# Altium PCB ClubNIKA.PcbDoc (part 3 of 3)
Units mm, origin at the board's own origin, x right, y up, seen from the top; angles counter-clockwise.
Board outline 246.38 x 165.73 mm, 2 copper layers (Top Layer, Bottom Layer); 346 components, 273 nets, 1174 pads, 422 vias.
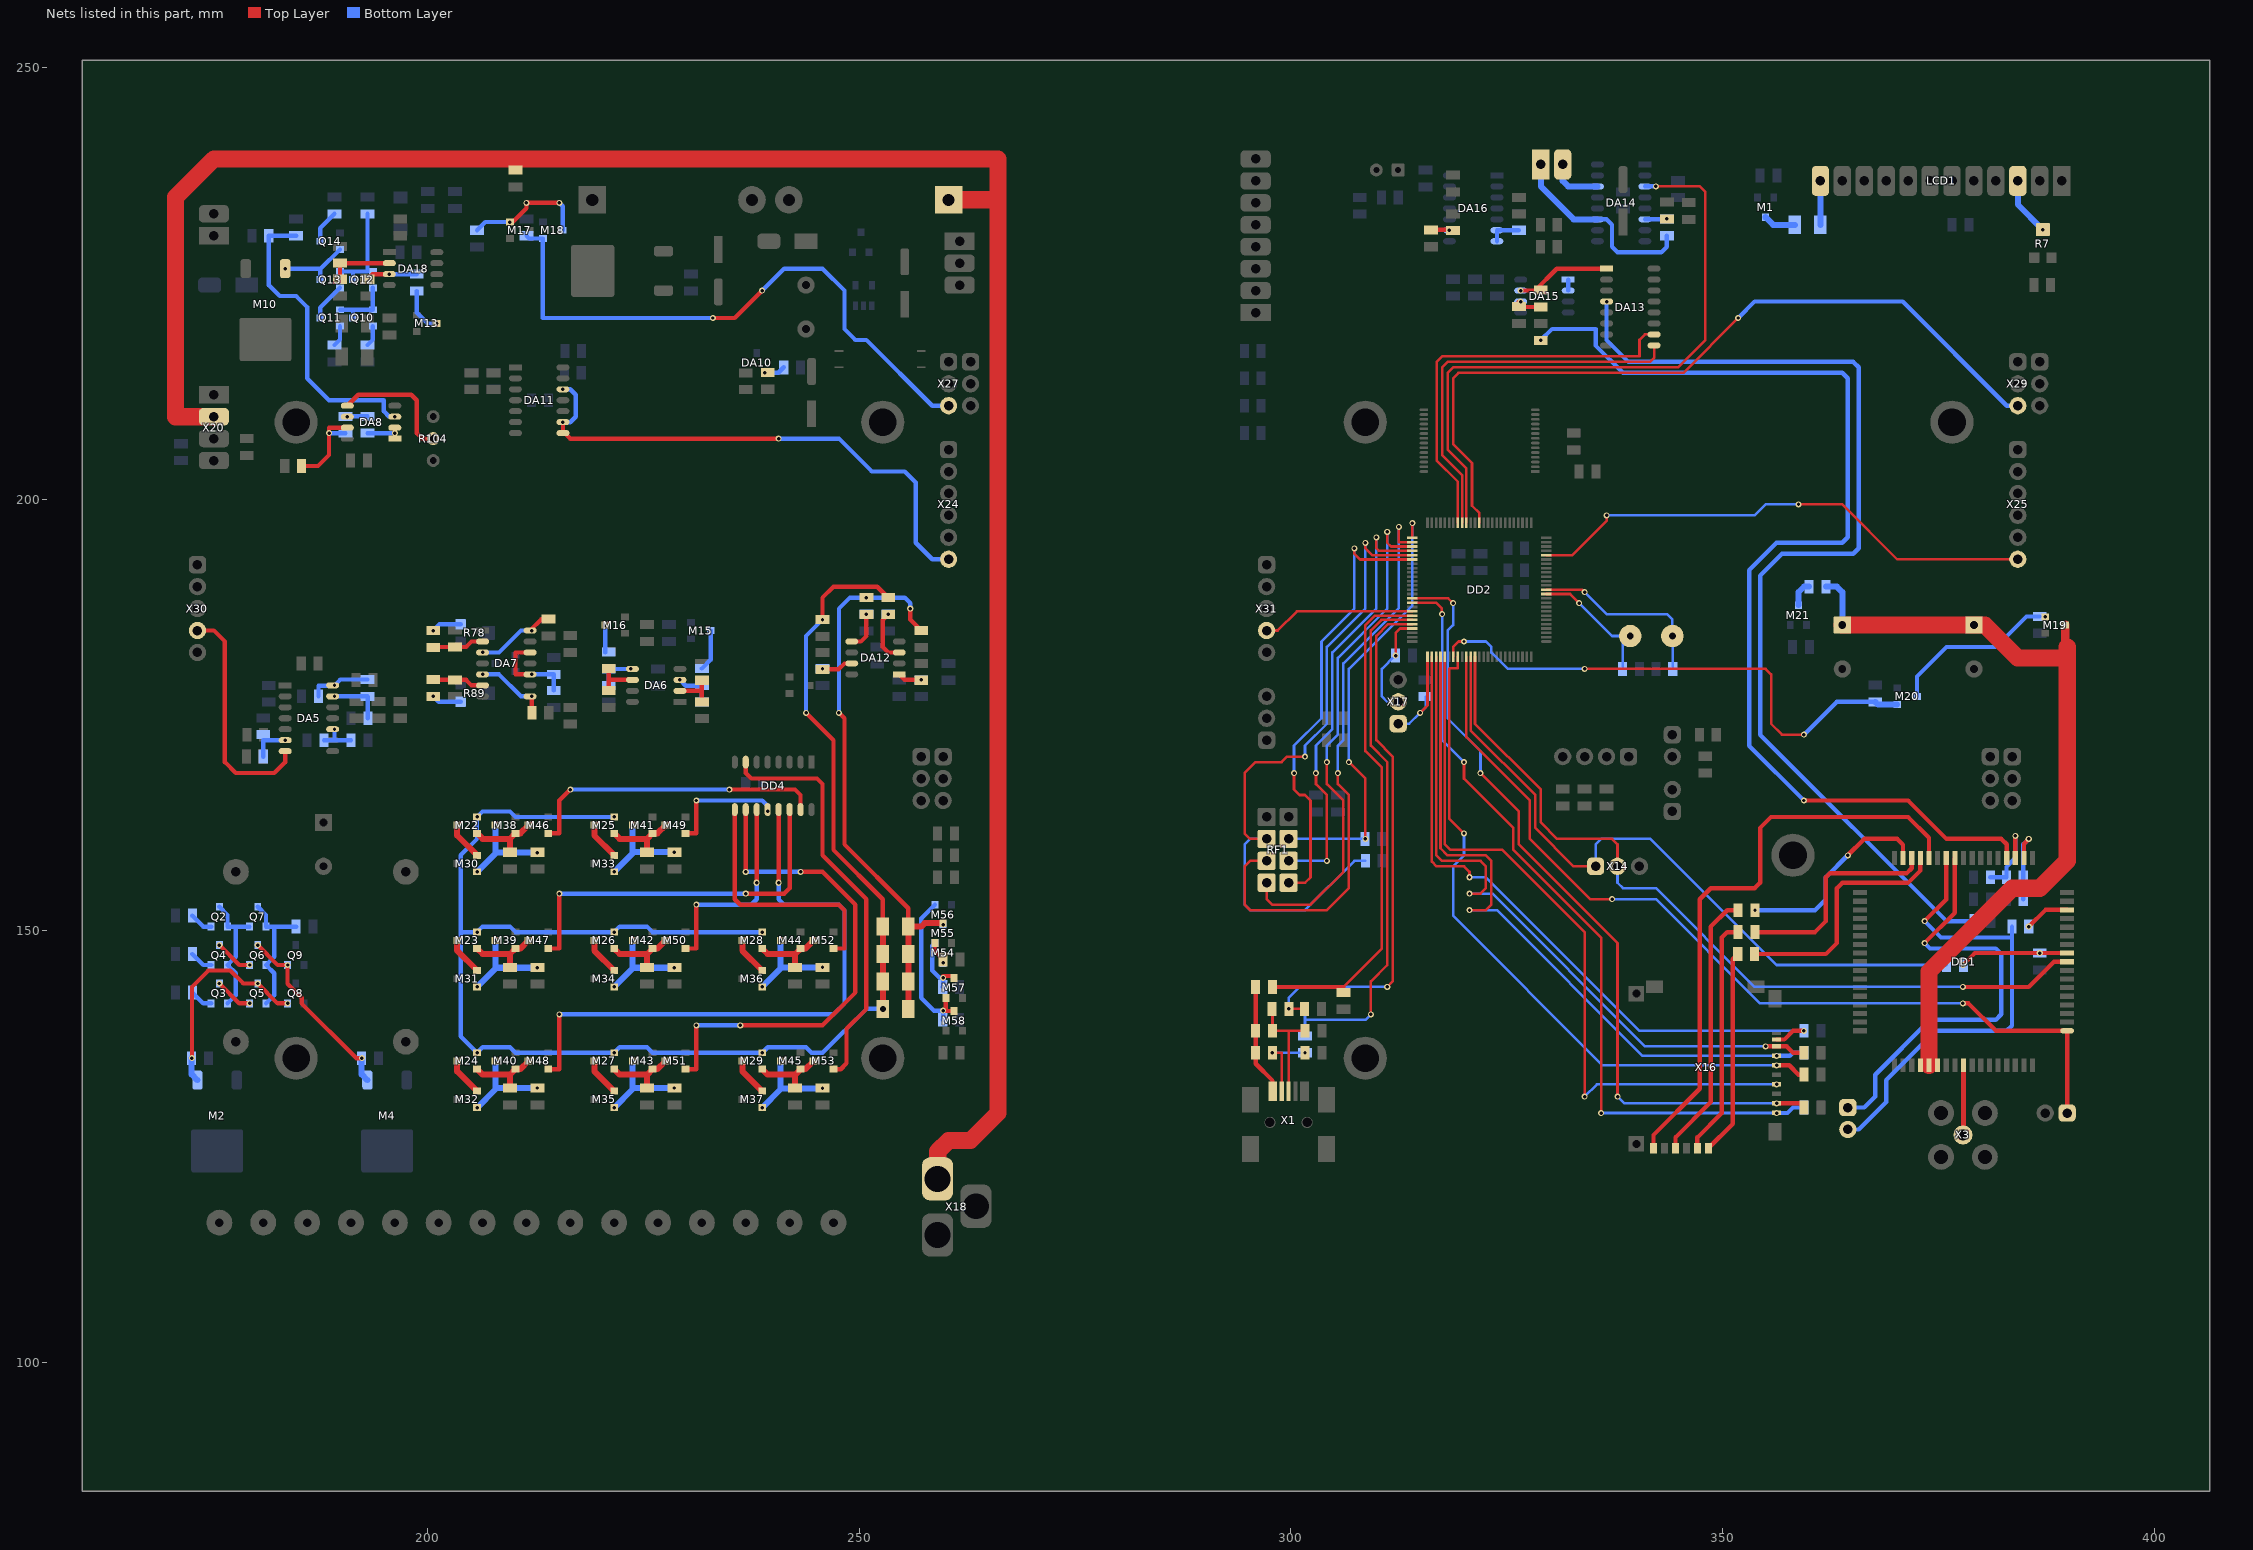
[diagram p3: the nets of this part, all layers, seen from the top]

## Via types
v1: diameter 0.7, hole 0.4, Top Layer to Bottom Layer, 390 vias
v2: diameter 1.3, hole 0.7, Top Layer to Bottom Layer, 15 vias
v3: diameter 1, hole 0.5, Top Layer to Bottom Layer, 6 vias
v4: diameter 1.2, hole 0.6, Top Layer to Bottom Layer, 6 vias
v5: diameter 1.5, hole 1, Top Layer to Bottom Layer, 3 vias
v6: diameter 1.4, hole 0.8, Top Layer to Bottom Layer, 2 vias

## Nets (pads, with @x,y where several pads share a name; then routed paths per layer and width w, separated by ;. In a path a pad name is that pad's centre, name@x,y a point inside that pad or via, vN(x,y) a via of type N, cw(c..) or ccw(c..) an arc to the next point about the centre after c; other vN are vias at no path point) (continued)
NetDA5_6: DA5.6 R114.1 R117.1 | length 4.4
  Bottom Layer w0.5: R117.1@180.975,170.18 180.975,172.085 v1(183.515,172.085)
NetDA5_10: DA5.10 R100.1 R107.2 | length 4.4
  Bottom Layer w0.5: R107.2@188.005,172.085 189.23,172.085 ; v1(189.23,173.355) 189.23,172.085 ; R100.1@191.135,172.085 189.23,172.085
NetDA5_13: DA5.13 R47.1 R48.2 | length 6.3
  Bottom Layer w0.5: v1(189.23,177.165) R47.1@193.04,177.165 ; R48.2@193.085,174.625 R47.1@193.085,177.12
NetDA5_14: DA5.14 R47.2 R49.2 | length 7.1
  Bottom Layer w0.5: R49.2@187.37,177.165 187.37,178.39 v1@189.185,178.39 ; v1(189.23,178.435) 189.91,179.115 R47.2@193.04,179.115
NetDA6_2: DA6.2 R65.2 R67.1 | length 5
  Top Layer w0.5: DA6.2@229.235,177.8 231.753,177.8 ; R67.1@231.775,176.53 R65.2@231.775,179.025
NetDA6_3: DA6.3 R64.1 R69.1 | length 4.7
  Bottom Layer w0.5: v1(229.235,179.07) 229.915,178.39 231.73,178.39 R69.1@231.775,178.435 R64.1@231.775,176.53
NetDA6_5: DA6.5 R59.1 R66.1 | length 3.8
  Bottom Layer w0.5: R59.1@220.98,178.435 R66.1@220.98,180.34 ; R66.1@221.615,180.34 v1(223.52,180.34)
NetDA6_6: DA6.6 R58.1 R60.1 | length 5.3
  Top Layer w0.5: R58.1@220.98,177.845 220.98,179.07 ; R60.1@220.98,180.385 220.98,179.07 ; DA6.6@223.735,179.07 220.98,179.07
NetDA7_2: DA7.2 R77.1 R86.2 | length 5.9
  Top Layer w0.5: R86.2@200.705,182.88 R77.1@203.2,182.88 204.47,182.88 205.105,183.515 DA7.2@206.375,183.515
NetDA7_3: DA7.3 DA7.14 R76.2 | length 9.4
  Top Layer w0.5: DA7.14@211.875,184.785 213.19,186.1 R76.2@213.995,186.1
  Bottom Layer w0.5: v1(206.375,182.245) 208.28,182.245 210.82,184.785 v1(212.09,184.785)
NetDA7_5: DA7.5 DA7.8 R113.1 | length 8.5
  Top Layer w0.5: R113.1@212.09,175.26 DA7.8@212.09,176.95
  Bottom Layer w0.5: v1(206.375,179.705) 208.28,179.705 210.82,177.165 v1(212.09,177.165)
NetDA7_6: DA7.6 R109.2 R112.1 | length 5.9
  Top Layer w0.5: R109.2@200.705,179.07 R112.1@203.2,179.07 204.47,179.07 205.105,178.435 DA7.6@206.375,178.435
NetDA7_10: DA7.10 DA7.12 R87.2 R88.1 | length 10.5
  Top Layer w0.5: DA7.12@211.875,182.245 210.185,182.245 210.185,179.705 DA7.10@211.875,179.705 v1(212.09,179.705)
  Bottom Layer w0.5: v1(212.09,179.705) R88.1@214.63,179.705 R87.2@214.63,177.845
NetDA8_1: DA8.1 DA8.2 R98.1 | length 4.4
  Top Layer w0.5: DA8.1@196.215,207.01 v1(196.215,207.645) DA8.2@196.215,208.28
  Bottom Layer w0.5: R98.1@193.04,207.645 v1(196.215,207.645)
NetDA8_3: DA8.3 R101.1 R103.1 | length 35.4
  Bottom Layer w0.5: R103.1@184.785,230.505 R101.1@181.61,230.505 181.61,224.79 182.88,223.52 184.785,223.52 186.055,222.25 186.055,213.995 188.595,211.455 194.945,211.455 194.945,210.185 195.58,209.55 v1(196.215,209.55)
NetDA8_5: DA8.5 R104.3 | length 14.8
  Top Layer w0.5: DA8.5@190.715,210.82 191.985,212.09 198.12,212.09 198.755,211.455 198.755,207.645 199.39,207.01 R104.3@200.66,207.01
NetDA8_6: DA8.6 R98.2 R106.2 | length 2.3
  Bottom Layer w0.5: R106.2@190.76,209.595 R98.2@193.04,209.595
  other v1: 190.715,209.55
NetDA8_7: DA8.7 R106.1 R111.1 | length 10.9
  Top Layer w0.5: R111.1@185.42,203.835 187.325,203.835 188.595,205.105 v1(188.595,207.645) 188.595,208.28 DA8.7@190.715,208.28
  Bottom Layer w0.5: v1(188.595,207.645) R106.1@190.5,207.645
NetDA10_1: DA10.1 R139.2 R140.2 | length 2.4
  Bottom Layer w0.5: v1(239.075,214.63) 240.62,214.63 R139.2@241.255,215.265
NetDA12_1: DA12.1 R172.2 R182.1 | length 2.8
  Top Layer w0.5: DA12.1@254.635,179.705 255.27,179.07 R172.2@257.13,179.07
  other v1: 257.175,179.07
NetDA12_3: DA12.3 R177.2 R178.1 | length 6.2
  Top Layer w0.5: R177.2@253.365,186.645 252.73,186.01 252.73,182.88 253.365,182.245 DA12.3@254.635,182.245
  other v1: 253.365,186.69
NetDA12_5: DA12.5 R179.2 R181.1 | length 4.4
  Top Layer w0.5: DA12.5@249.135,183.515 250.19,183.515 250.825,184.15 R179.2@250.825,186.645
  other v1: 250.825,186.69
NetDA12_7: DA12.7 R174.2 R183.2 | length 3.7
  Top Layer w0.5: R174.2@245.745,180.295 247.605,180.295 248.285,180.975 DA12.7@249.135,180.975
  other v1: 245.745,180.34
NetDA13_4: DA13.4 R186.1 | length 120.8
  Bottom Layer w0.5: v1(336.55,222.885) 336.55,218.44 339.09,215.9 365.125,215.9 365.76,215.265 365.76,194.31 365.125,193.675 356.87,193.675 354.33,191.135 354.33,172.72 375.92,151.13 R186.1@379.095,151.13
NetDA14_6: DA14.6 R184.2 R185.1 | length 2.6
  Bottom Layer w0.5: DA14.6@340.995,232.41 343.49,232.41 v1(343.535,232.455)
NetDA14_11: DA14.11 LS1.1 R184.1 | length 23.3
  Bottom Layer w0.5: DA14.11@335.495,232.41 336.55,232.41 337.185,231.775 337.185,229.235 337.82,228.6 342.9,228.6 343.535,229.235 R184.1@343.535,230.505
  Bottom Layer w0.7: LS1.1@328.93,238.76 328.93,236.22 332.74,232.41 DA14.11@335.495,232.41
NetDA14_14: DA14.14 LS1.2 | length 6.2
  Bottom Layer w0.7: LS1.2@331.47,238.76 331.47,236.855 332.105,236.22 DA14.14@335.495,236.22
NetDA15_1: DA15.1 DA15.2 | length 1.3
  Bottom Layer w0.5: DA15.2@332.105,224.155 DA15.1@332.105,225.425
NetDA15_6: DA15.6 R189.1 R190.2 | length 2.8
  Top Layer w0.5: R190.2@326.435,222.25 R189.1@328.93,222.25 ; v1@326.435,222.84 326.39,222.885 v1(326.605,222.885)
NetDA16_6: DA16.6 DA16.7 R200.1 | length 3.8
  Bottom Layer w0.5: DA16.7@323.85,229.87 DA16.6@323.85,231.14 R200.1@326.39,231.14
NetDA16_9: DA16.9 R192.2 R193.2 | length 2.4
  Top Layer w0.5: R192.2@316.23,231.185 R193.2@318.68,231.185
  other v1: 318.35,231.14
NetDA18_2: DA18.2 R212.2 R214.1 | length 7.6
  Top Layer w0.5: R212.2@189.865,225.47 R214.1@189.865,227.33 DA18.2@195.58,227.33
NetDA18_3: DA18.3 R211.2 R213.1 | length 6
  Top Layer w0.5: R211.2@193.04,225.47 193.63,226.06 v1(195.58,226.06)
  Bottom Layer w0.5: v1(195.58,226.06) R213.1@198.755,226.06
NetDD1_10: DD1.10 R13.2 R14.1 | length 12.6
  Top Layer w0.5: v1(377.825,146.05) 379.205,147.43 DD1.10@389.89,147.43
  other v1: 386.715,147.43
NetDD1_60: DD1.60 X3.1 | length 8.2
  Top Layer w0.6: X3.1@377.825,126.365 X3.1@377.89,126.43 ; X3.1@377.89,126.365 DD1.60@377.89,134.43
NetDD4_7: DD4.7 M53.1 | length 47.9
  Top Layer w0.5: DD4.7@236.855,169.545 236.855,168.275 237.49,167.64 245.11,167.64 245.745,167.005 245.745,158.75 250.825,153.67 250.825,140.97 248.527,138.672 248.527,134.662 247.851,133.985 M53.1@247.015,133.985
NetDD4_9: DD4.9 M52.1 | length 29.3
  Top Layer w0.5: DD4.9@235.585,164.045 235.585,153.67 236.22,153.035 247.65,153.035 248.285,152.4 248.285,147.955 M52.1@247.015,147.955
NetDD4_10: DD4.10 M51.1 | length 58
  Top Layer w0.5: M51.1@229.87,133.985 231.14,133.985 v1(231.14,139.065) ; v1(236.22,139.065) 245.745,139.065 249.555,142.875 249.555,153.035 245.745,156.845 v1(243.205,156.845) ; v1(236.855,156.845) DD4.10@236.855,164.045
  Bottom Layer w0.5: v1(231.14,139.065) v1(236.22,139.065) ; v1(236.855,156.845) v1(243.205,156.845)
NetDD4_11: DD4.11 M50.1 | length 24
  Top Layer w0.5: M50.1@229.87,147.955 231.14,147.955 v1(231.14,153.035) ; v1(238.125,155.575) DD4.11@238.125,164.045
  Bottom Layer w0.5: v1(231.14,153.035) 237.49,153.035 238.125,153.67 v1(238.125,155.575)
NetDD4_12: DD4.12 M49.1 | length 14.2
  Top Layer w0.5: M49.1@229.87,161.29 231.14,161.29 v1(231.14,165.1)
  Bottom Layer w0.5: v1(231.14,165.1) 238.76,165.1 239.395,164.465 v1(239.395,163.83)
NetDD4_13: DD4.13 M48.1 | length 70.5
  Top Layer w0.5: M48.1@213.995,133.985 215.265,133.985 v1@215.265,140.368 ; v1(240.665,155.575) DD4.13@240.665,164.045
  Bottom Layer w0.5: v1(215.265,140.335) 219.075,140.335 247.015,140.335 248.285,141.605 248.285,152.4 247.65,153.035 241.3,153.035 240.665,153.67 v1(240.665,155.575)
NetDD4_14: DD4.14 M47.1 | length 43.7
  Top Layer w0.5: M47.1@213.995,147.955 215.265,147.955 v1(215.265,154.305) ; v1(236.855,154.305) 241.3,154.305 241.935,154.94 DD4.14@241.935,164.045
  Bottom Layer w0.5: v1(215.265,154.305) 229.235,154.305 v1(236.855,154.305)
NetDD4_15: DD4.15 M46.1 | length 35.5
  Top Layer w0.5: M46.1@213.995,161.29 215.265,161.29 215.265,165.1 v1(216.535,166.37) ; v1(234.95,166.37) 242.57,166.37 243.205,165.735 DD4.15@243.205,164.045
  Bottom Layer w0.5: v1(216.535,166.37) v1(234.95,166.37)
NetLCD1_LED-: LCD1.LED- R5.1 | length 5.1
  Bottom Layer w0.7: R5.1@361.315,231.775 LCD1.LED-@361.315,236.855
NetLCD1_V0: LCD1.V0 R7.3 | length 6.8
  Bottom Layer w0.7: LCD1.V0@384.175,236.855 384.175,234.12 v1(387.08,231.215)
NetM1_3: M1.3 R5.2 | length 3.8
  Bottom Layer w0.7: M1.3@354.965,232.65 355.84,231.775 R5.2@358.365,231.775
NetM2_1: M2.1 Q5.3 Q8.2 R45.2 | length 24.5
  Top Layer w0.5: v1(172.72,135.255) 172.72,143.51 174.625,145.415 177.165,145.415 178.675,143.905 v1(180.34,143.905) 182.64,141.605 v1(183.79,141.605)
  Bottom Layer w0.7: R45.2@172.675,135.255 172.675,133.395 M2.1@173.355,132.715
NetM4_1: M4.1 Q6.3 Q9.2 R54.2 | length 22
  Top Layer w0.5: v1(180.34,148.35) 182.64,146.05 v1(183.79,146.05) 183.79,143.87 185.42,142.24 185.42,141.605 191.77,135.255 v1(192.405,135.255)
  Bottom Layer w0.7: R54.2@192.36,135.255 192.36,133.395 M4.1@193.04,132.715
NetM10_1: M10.1 Q13.3 Q14.2 | length 8.5
  Bottom Layer w0.5: v1(183.515,226.695) 187.49,226.695 187.565,226.62 ; Q13.3@187.565,225.425 187.565,226.62 ; Q14.2@189.865,228.92 187.565,226.62
NetM13_3: M13.3 R213.2 | length 5.3
  Bottom Layer w0.5: R213.2@198.755,224.11 198.755,221.615 200.025,220.345 v1(201.055,220.345)
NetM15_3: M15.3 R69.2 | length 4.8
  Bottom Layer w0.5: R69.2@231.775,180.385 232.805,181.415 M15.3@232.805,184.785
NetM16_3: M16.3 R66.2 | length 3.2
  Bottom Layer w0.5: R66.2@220.585,182.245 v1(220.585,185.42)
NetM17_1: M17.1 M18.3 R92.1 | length 14.6
  Top Layer w0.5: v1(209.55,232.09) 209.865,232.09 211.455,233.68 v1(211.455,234.315) v1(215.265,234.315)
  Bottom Layer w0.5: R92.1@205.74,231.14 206.69,232.09 v1(209.55,232.09) ; v1(215.265,234.315) 215.66,233.92 M18.3@215.66,231.14
NetM19_1: M19.1 M20.3 R115.2 | length 19.4
  Bottom Layer w0.5: M20.3@372.505,177.165 372.505,179.465 375.92,182.88 381.635,182.88 385.175,186.42 R115.2@386.715,186.42
  other v1: 387.35,186.37
NetM21_3: M21.3 R116.2 | length 3
  Bottom Layer w0.7: M21.3@358.775,187.72 358.775,189.23 359.41,189.865 R116.2@360,189.865
NetM22_1: M22.1 M38.1 M46.3 R147.2 | length 8.4
  Top Layer w0.7: M22.1@205.74,161.29 206.375,160.655 209.55,160.655 ; R147.2@209.55,159.11 209.55,160.655 ; M46.3@211.695,162.24 210.745,161.29 M38.1@210.185,161.29 209.55,160.655
NetM22_3: M22.3 M30.2 | length 4.4
  Top Layer w0.7: M22.3@203.44,162.24 203.44,161.045 M30.2@205.74,158.745
NetM23_1: M23.1 M39.1 M47.3 R149.2 | length 8.4
  Top Layer w0.7: M23.1@205.74,147.955 206.375,147.32 209.55,147.32 ; R149.2@209.55,145.775 209.55,147.32 ; M47.3@211.695,148.905 210.745,147.955 M39.1@210.185,147.955 209.55,147.32
NetM23_3: M23.3 M31.2 | length 4.4
  Top Layer w0.7: M23.3@203.44,148.905 203.44,147.71 M31.2@205.74,145.41
NetM24_1: M24.1 M40.1 M48.3 R151.2 | length 8.4
  Top Layer w0.7: M24.1@205.74,133.985 206.375,133.35 209.55,133.35 ; R151.2@209.55,131.805 209.55,133.35 ; M48.3@211.695,134.935 210.745,133.985 M40.1@210.185,133.985 209.55,133.35
NetM24_3: M24.3 M32.2 | length 4.4
  Top Layer w0.7: M24.3@203.44,134.935 203.44,133.74 M32.2@205.74,131.44
NetM25_1: M25.1 M41.1 M49.3 R153.2 | length 8.4
  Top Layer w0.7: M25.1@221.615,161.29 222.25,160.655 225.425,160.655 ; R153.2@225.425,159.11 225.425,160.655 ; M49.3@227.57,162.24 226.62,161.29 M41.1@226.06,161.29 225.425,160.655
NetM25_3: M25.3 M33.2 | length 4.4
  Top Layer w0.7: M25.3@219.315,162.24 219.315,161.045 M33.2@221.615,158.745
NetM26_1: M26.1 M42.1 M50.3 R155.2 | length 8.4
  Top Layer w0.7: M26.1@221.615,147.955 222.25,147.32 225.425,147.32 ; R155.2@225.425,145.775 225.425,147.32 ; M50.3@227.57,148.905 226.62,147.955 M42.1@226.06,147.955 225.425,147.32
NetM26_3: M26.3 M34.2 | length 4.4
  Top Layer w0.7: M26.3@219.315,148.905 219.315,147.71 M34.2@221.615,145.41
NetM27_1: M27.1 M43.1 M51.3 R157.2 | length 8.4
  Top Layer w0.7: M27.1@221.615,133.985 222.25,133.35 225.425,133.35 ; R157.2@225.425,131.805 225.425,133.35 ; M51.3@227.57,134.935 226.62,133.985 M43.1@226.06,133.985 225.425,133.35
NetM27_3: M27.3 M35.2 | length 4.4
  Top Layer w0.7: M27.3@219.315,134.935 219.315,133.74 M35.2@221.615,131.44
NetM28_1: M28.1 M44.1 M52.3 R159.2 | length 8.4
  Top Layer w0.7: M28.1@238.76,147.955 239.395,147.32 242.57,147.32 ; R159.2@242.57,145.775 242.57,147.32 ; M52.3@244.715,148.905 243.765,147.955 M44.1@243.205,147.955 242.57,147.32
NetM28_3: M28.3 M36.2 | length 4.4
  Top Layer w0.7: M28.3@236.46,148.905 236.46,147.71 M36.2@238.76,145.41
NetM29_1: M29.1 M45.1 M53.3 R161.2 | length 8.4
  Top Layer w0.7: M29.1@238.76,133.985 239.395,133.35 242.57,133.35 ; R161.2@242.57,131.805 242.57,133.35 ; M53.3@244.715,134.935 243.765,133.985 M45.1@243.205,133.985 242.57,133.35
NetM29_3: M29.3 M37.2 | length 4.4
  Top Layer w0.7: M29.3@236.46,134.935 236.46,133.74 M37.2@238.76,131.44
NetM30_1: M30.1 M38.3 R148.2 | length 11
  Bottom Layer w0.7: v1(205.74,156.845) 207.885,158.99 v1(207.885,162.24) ; 207.96,159.065 v1(212.725,159.065)
NetM31_1: M31.1 M39.3 R150.2 | length 11.2
  Bottom Layer w0.7: v1(205.74,143.51) 207.885,145.655 ; v1(207.885,148.905) 207.885,145.655 ; v1(212.725,145.73) 207.96,145.73 207.885,145.655
NetM32_1: M32.1 M40.3 R152.2 | length 11
  Bottom Layer w0.7: v1(205.74,129.54) 207.885,131.685 v1(207.885,134.935) ; 208.005,131.805 v1(212.725,131.805)
NetM33_1: M33.1 M41.3 R154.2 | length 11
  Bottom Layer w0.7: v1(221.615,156.845) 223.76,158.99 v1(223.76,162.24) ; 223.88,159.11 v1(228.6,159.11)
NetM34_1: M34.1 M42.3 R156.2 | length 11.2
  Bottom Layer w0.7: v1(221.615,143.51) 223.76,145.655 ; v1(223.76,148.905) 223.76,145.655 ; v1(228.6,145.73) 223.835,145.73 223.76,145.655
NetM35_1: M35.1 M43.3 R158.2 | length 11.2
  Bottom Layer w0.7: v1(221.615,129.54) 223.76,131.685 ; v1(223.76,134.935) 223.76,131.685 ; v1(228.6,131.805) 223.88,131.805 223.76,131.685
NetM36_1: M36.1 M44.3 R160.2 | length 11.2
  Bottom Layer w0.7: v1(238.76,143.51) 240.905,145.655 ; v1(240.905,148.905) 240.905,145.655 ; v1(245.745,145.775) 241.025,145.775 240.905,145.655
NetM37_1: M37.1 M45.3 R162.2 | length 11.2
  Bottom Layer w0.7: v1(238.76,129.54) 240.905,131.685 ; v1(240.905,134.935) 240.905,131.685 ; v1(245.745,131.76) 240.98,131.76 240.905,131.685
NetM54_1: M54.1 M57.3 R167.2 | length 7.4
  Top Layer w0.5: v1@259.715,144.78 260.745,144.78 M57.3@260.985,144.54
  Bottom Layer w0.5: M54.1@258.765,148.59 258.445,148.27 258.445,145.415 259.295,144.565 v1(259.715,144.565) 259.715,143.555 R167.2@259.67,143.51
NetM54_3: M54.3 M55.1 R175.1 | length 2.3
  Top Layer w0.5: M55.1@258.765,148.59 258.765,147.635 R175.1@259.715,146.685
  other v1: 259.715,146.29
NetM56_1: M56.1 M57.1 M58.3 R166.2 | length 18.1
  Top Layer w0.5: v1@260.035,140.73 M58.3@260.985,140.73 ; v1@260.035,140.755 M57.1@260.035,142.24
  Bottom Layer w0.5: M56.1@258.765,153.035 257.175,151.445 257.175,142.24 258.66,140.755 v1(259.715,140.755) 259.715,139.745 R166.2@259.67,139.7
NetQ2_1: Q2.1 Q2.3 Q3.1 Q4.1 Q7.2 | length 15.3
  Bottom Layer w0.5: Q2.3@175.895,152.795 176.845,151.845 Q2.1@176.845,150.495 177.8,150.495 ; Q3.1@176.845,141.605 177.8,142.56 177.8,145.095 Q4.1@176.845,146.05 177.8,147.005 177.8,150.495 ; Q7.2@179.39,150.495 177.8,150.495
NetQ2_2: Q2.2 R62.2 | length 2.7
  Bottom Layer w0.5: R62.2@172.765,151.765 174.035,150.495 Q2.2@174.945,150.495
NetQ3_2: Q3.2 R56.2 | length 2.7
  Bottom Layer w0.5: R56.2@172.765,142.875 174.035,141.605 Q3.2@174.945,141.605
NetQ3_3: Q3.3 Q5.2 | length 4.4
  Top Layer w0.5: v1(175.895,143.905) 178.195,141.605 v1(179.39,141.605)
NetQ4_2: Q4.2 R57.2 | length 2.7
  Bottom Layer w0.5: R57.2@172.765,147.32 174.035,146.05 Q4.2@174.945,146.05
NetQ4_3: Q4.3 Q6.2 | length 4.4
  Top Layer w0.5: v1(175.895,148.35) 178.195,146.05 v1(179.39,146.05)
NetQ5_1: Q5.1 Q6.1 Q7.1 Q7.3 R68.1 | length 17.2
  Bottom Layer w0.5: Q7.3@180.34,152.795 181.29,151.845 Q7.1@181.29,150.495 ; Q5.1@181.29,141.605 182.245,142.56 182.245,145.095 Q6.1@181.29,146.05 182.245,147.005 182.245,150.495 Q7.1@181.29,150.495 ; R68.1@184.785,150.495 Q7.1@181.29,150.495
NetQ10_1: Q10.1 Q10.3 Q11.1 Q12.2 | length 7.3
  Bottom Layer w0.5: Q11.1@189.865,221.93 191.375,221.93 ; Q10.3@191.375,220.98 191.375,221.93 ; Q12.2@193.675,224.475 Q10.1@193.675,221.93 191.375,221.93
NetQ10_2: Q10.2 R72.2 | length 2.4
  Bottom Layer w0.5: R72.2@193.04,217.85 193.675,218.485 Q10.2@193.675,220.03
NetQ11_2: Q11.2 R73.2 | length 2.4
  Bottom Layer w0.5: R73.2@189.23,217.85 189.865,218.485 Q11.2@189.865,220.03
NetQ11_3: Q11.3 Q13.2 | length 4.4
  Bottom Layer w0.5: Q11.3@187.565,220.98 187.565,222.175 Q13.2@189.865,224.475
NetQ12_1: Q12.1 Q12.3 Q13.1 R85.1 | length 10.8
  Bottom Layer w0.5: Q13.1@189.865,226.375 191.375,226.375 ; Q12.3@191.375,225.425 191.375,226.375 ; R85.1@193.04,233.045 193.04,226.375 191.375,226.375
NetQ14_3: Q14.3 R210.1 | length 3.9
  Bottom Layer w0.5: Q14.3@187.565,229.87 187.565,231.38 R210.1@189.23,233.045
NetR1_1: R1.1 R2.1 R6.1 X1.+5 | length 12.9
  Top Layer w0.5: R6.1@295.91,143.51 R1.1@295.91,138.43 R2.1@295.91,135.89 295.91,134.62 297.87,132.66 X1.+5@297.87,131.445
NetR1_2: R1.2 R4.1 R10.1 X1.D+ | length 13.2
  Top Layer w0.3: R4.1@297.86,140.925 R1.2@297.86,138.43 299.72,138.43 ; X1.D+@299.72,131.445 299.72,138.43 ; R10.1@301.625,138.43 299.72,138.43
NetR2_2: R2.2 R3.1 R11.1 X1.D- | length 9.3
  Top Layer w0.3: R2.2@297.86,135.89 298.92,135.89 X1.D-@298.92,131.445
  Bottom Layer w0.3: v1(297.815,135.89) v1(301.625,135.89)
NetR23_1: R23.1 X16.SIM_CLK | length 27.7
  Top Layer w0.5: X16.SIM_CLK@347.065,124.83 347.065,126.085 349.885,128.905 349.885,149.225 350.52,149.86 R23.1@351.79,149.86
NetR24_2: R24.2 X16.SIM_DATA | length 23.9
  Top Layer w0.5: X16.SIM_DATA@348.335,124.83 351.155,127.65 351.155,146.73 R24.2@351.745,147.32
NetR25_1: R25.1 X16.SIM_RES | length 31.3
  Top Layer w0.5: X16.SIM_RES@344.525,124.83 344.525,126.085 348.615,130.175 348.615,150.495 350.52,152.4 R25.1@351.79,152.4
NetR78_2: R78.2 R86.1 | length 3.5
  Bottom Layer w0.5: v1(200.66,184.785) 201.39,185.515 R78.2@203.835,185.515
NetR89_1: R89.1 R109.1 | length 3.4
  Bottom Layer w0.5: v1(200.66,177.165) 201.295,176.53 R89.1@203.835,176.53
NRF_CE: DD2.55 R43.1 RF1.3 | length 78
  Top Layer w0.3: RF1.3@297.18,160.655 295.275,160.655 294.64,161.29 294.64,168.275 295.91,169.545 298.926,169.545 299.561,170.18 v1(301.625,170.18) ; v1(308.61,194.945) 308.61,194.31 309.405,193.515 DD2.55@314.065,193.515
  Bottom Layer w0.3: RF1.3@297.18,160.655 295.275,160.655 294.64,160.02 294.64,153.035 295.275,152.4 301.625,152.4 307.34,158.115 R43.1@308.61,158.115 ; v1(301.625,170.18) 301.625,171.45 304.165,173.99 304.165,182.88 308.61,187.325 v1(308.61,194.945)
NRF_CSN: DD2.51 R42.2 RF1.4 | length 51
  Top Layer w0.3: v1(306.705,169.545) 308.61,167.64 v1(308.61,160.655) ; DD2.51@314.065,195.515 v1(314.065,197.225)
  Bottom Layer w0.3: RF1.4@299.72,160.655 v1(308.61,160.655) ; v1(306.705,169.545) 306.705,180.34 314.065,187.7 v1(314.065,197.225)
NRF_IRQ: DD2.56 RF1.8 | length 52.6
  Top Layer w0.3: RF1.8@299.72,155.575 301.625,155.575 302.26,156.21 302.26,165.1 301.625,165.735 300.99,165.735 300.355,166.37 v1(300.355,168.275) ; v1(307.34,194.31) 307.34,193.675 308,193.015 DD2.56@314.065,193.015
  Bottom Layer w0.3: v1(300.355,168.275) 300.355,171.45 303.53,174.625 303.53,183.515 307.34,187.325 v1(307.34,194.31)
NRF_MISO: DD2.53 RF1.7 | length 60.1
  Top Layer w0.3: RF1.7@297.18,155.575 297.18,153.67 297.815,153.035 302.26,153.035 306.07,156.845 306.07,165.1 304.165,167.005 v1(304.165,169.545) ; v1(311.15,196.215) 311.15,194.945 311.58,194.515 DD2.53@314.065,194.515
  Bottom Layer w0.3: v1(304.165,169.545) 304.165,171.45 305.435,172.72 305.435,181.61 311.15,187.325 v1(311.15,196.215)
NRF_MOSI: DD2.54 RF1.6 | length 50.9
  Top Layer w0.3: v1(302.895,168.275) 302.895,167.005 304.165,165.735 v1(304.165,158.115) ; v1(309.88,195.58) 309.88,194.31 310.175,194.015 DD2.54@314.065,194.015
  Bottom Layer w0.3: RF1.6@299.72,158.115 v1(304.165,158.115) ; v1(302.895,168.275) 302.895,171.45 304.8,173.355 304.8,182.245 309.88,187.325 v1(309.88,195.58)
NRF_SCK: DD2.52 RF1.5 | length 69.3
  Top Layer w0.3: RF1.5@297.18,158.115 295.275,158.115 294.64,157.48 294.64,153.035 295.275,152.4 304.165,152.4 306.705,154.94 306.705,165.735 305.435,167.005 v1(305.435,168.275) ; v1(312.49,196.78) 312.49,195.015 DD2.52@314.065,195.015
  Bottom Layer w0.3: v1(305.435,168.275) 305.435,171.45 306.07,172.085 306.07,180.975 312.49,187.395 v1(312.49,196.78)
OSC_IN: C5.2 DD2.12 Q1.1 | length 15.9
  Top Layer w0.3: DD2.12@329.565,189.015 332.32,189.015 v1(333.375,187.96)
  Bottom Layer w0.3: v1(333.375,187.96) 337.185,184.15 Q1.1@339.29,184.15 338.41,183.27 C5.2@338.41,180.34
OSC_OUT: C6.2 DD2.13 Q1.2 | length 21.7
  Top Layer w0.3: DD2.13@329.565,189.515 333.725,189.515 v1(334.01,189.23)
  Bottom Layer w0.3: v1(334.01,189.23) 336.55,186.69 343.535,186.69 344.17,186.055 Q1.2@344.17,184.15 ; C6.2@344.215,180.34 Q1.2@344.215,184.105
SD_CLK: DD2.80 X16.SD_CLK | length 84
  Top Layer w0.3: DD2.80@317.815,181.765 317.815,160.02 318.45,159.385 324.485,159.385 334.01,149.86 v1(334.01,130.81)
  Bottom Layer w0.3: v1(334.01,130.81) 335.43,132.23 v1(356.235,132.23)
SD_CMD: DD2.83 R28.1 X16.SD_CMD | length 80.5
  Top Layer w0.3: DD2.83@319.315,181.765 319.315,180.43 318.405,180.43 318.315,180.34 318.315,163.015 v1(320.04,161.29)
  Top Layer w0.5: v1(356.235,134.43) 357.695,134.43 358.775,133.35 R28.1@359.41,133.35
  Bottom Layer w0.3: v1(320.04,161.29) 320.04,158.75 318.77,157.48 318.77,151.765 336.105,134.43 v1(356.235,134.43)
SD_DAT0: DD2.65 R34.1 X16.SD_DAT0 | length 92.6
  Top Layer w0.3: DD2.65@314.065,188.515 318.215,188.515 v1(318.77,187.96) ; v1(321.945,168.275) 326.39,163.83 326.39,160.02 337.82,148.59 v1(337.82,130.81)
  Top Layer w0.5: v1(356.235,130.03) 358.92,130.03 R34.1@359.41,129.54
  Bottom Layer w0.3: v1(318.77,187.96) 318.77,185.42 318.135,184.785 318.135,174.625 321.945,170.815 v1(321.945,168.275) ; v1(337.82,130.81) 338.6,130.03 v1(356.235,130.03)
SD_DAT1: DD2.66 R29.1 X16.SD_DAT1 | length 93.4
  Top Layer w0.3: DD2.66@314.065,188.015 316.81,188.015 317.445,187.38 v1@317.445,186.745 ; v1(320.04,169.545) 320.04,167.64 325.755,161.925 325.755,159.385 335.915,149.225 v1(335.915,128.905)
  Bottom Layer w0.3: v1(317.5,186.69) 317.5,172.085 v1(320.04,169.545) ; v1(335.915,128.905) v1(356.235,128.905)
  Bottom Layer w0.5: v1(356.235,128.905) 357.505,128.905 358.14,129.54 R29.1@359.41,129.54
SD_DAT2: DD2.78 R33.1 X16.SD_DAT2 | length 80.3
  Top Layer w0.3: DD2.78@316.815,181.765 316.815,158.8 317.5,158.115 321.945,158.115 322.58,157.48 322.58,154.94 321.945,154.305 v1(320.675,154.305)
  Top Layer w0.5: v1(354.965,136.63) X16.SD_DAT2@356.235,136.63 357.4,136.63 358.14,135.89 R33.1@359.41,135.89
  Bottom Layer w0.3: v1(320.675,154.305) 323.32,154.305 340.995,136.63 v1(354.965,136.63)
SD_DAT3: DD2.79 R30.1 X16.SD_DAT3 | length 82.5
  Top Layer w0.3: DD2.79@317.315,181.765 317.315,159.57 318.135,158.75 322.58,158.75 323.215,158.115 323.215,153.035 322.58,152.4 v1(320.675,152.4)
  Bottom Layer w0.3: v1(320.675,152.4) 323.85,152.4 340.72,135.53 v1(356.235,135.53)
  Bottom Layer w0.5: v1(356.235,135.53) 357.78,135.53 358.14,135.89 R30.1@359.41,135.89
SD_PRES: DD2.77 R31.1 X16.SD_PRES2 | length 78.9
  Top Layer w0.3: DD2.77@316.315,181.765 316.315,158.03 316.865,157.48 320.04,157.48 320.675,156.845 v1(320.675,156.21)
  Top Layer w0.5: X16.SD_PRES2@356.235,137.43 357.14,137.43 358.14,138.43 v1(359.41,138.43)
  Bottom Layer w0.3: v1(320.675,156.21) 322.58,156.21 340.36,138.43 v1(359.41,138.43)
SENS_EXT: M22.2 M23.2 M24.2 M25.2 M26.2 M27.2 M28.2 M29.2 R168.1 R169.1 R170.1 R171.1 R176.1 R177.1 | length 192.7
  Top Layer w0.5: v1(243.84,175.26) 247.015,172.085 247.015,159.385 252.73,153.67 R170.1@252.73,150.495 ; v1(245.745,186.055) 245.745,188.595 247.015,189.865 252.095,189.865 R177.1@253.365,188.595
  Top Layer w0.7: v2(252.73,140.97) R169.1@252.73,144.145 R171.1@252.73,147.32 R170.1@252.73,150.495
  Bottom Layer w0.5: v1@221.61,135.89 210.185,135.89 209.55,136.525 206.38,136.525 v1(205.74,135.885) 203.835,137.79 203.835,149.86 ; v1(221.615,135.885) 221.615,135.89 222.25,136.525 225.425,136.525 226.06,135.89 v1(238.76,135.89) 239.395,136.525 243.84,136.525 244.475,135.89 245.745,135.89 250.825,140.97 v2(252.73,140.97) ; v1(221.615,163.195) 210.185,163.195 209.55,163.83 206.375,163.83 v1(205.74,163.195) 205.74,160.655 203.835,158.75 203.835,149.86 ; v1(238.76,149.86) 226.06,149.86 225.425,150.495 222.25,150.495 v1(221.615,149.86) 210.185,149.86 209.55,150.495 206.375,150.495 v1(205.74,149.86) 203.835,149.86 ; v1(243.84,175.26) 243.84,184.15 v1(245.745,186.055)
SENS_INT: M55.3 M56.3 R168.2 R169.2 R170.2 R171.2 R173.1 R179.1 | length 66.6
  Top Layer w0.5: v1(247.65,175.26) 248.285,174.625 248.285,160.02 255.68,152.625 R170.2@255.68,150.495 ; v1(255.905,187.325) 255.905,186.055 R173.1@257.175,184.785
  Top Layer w0.7: R168.2@255.68,140.97 R169.2@255.68,144.145 R171.2@255.68,147.32 R170.2@255.68,150.495 257.175,150.495 257.57,150.89 M55.3@259.715,150.89
  Bottom Layer w0.5: v1(247.65,175.26) 247.65,187.325 248.92,188.595 v1(250.825,188.595) 255.27,188.595 255.905,187.96 v1(255.905,187.325)
  other v1: 259.715,150.735
SET_BAT_SUPPLY_B1: M18.1 R99.1 X27.3 | length 69.8
  Top Layer w0.5: v1(233.045,220.98) 235.585,220.98 v1(238.76,224.155)
  Bottom Layer w0.5: R99.1@211.455,230.505 211.77,230.19 M18.1@213.36,230.19 213.36,220.98 v1(233.045,220.98) ; v1(238.76,224.155) 241.3,226.695 245.745,226.695 248.285,224.155 248.285,219.71 249.555,218.44 250.825,218.44 258.445,210.82 X27.3@260.35,210.82
SET_BAT_SUPPLY_B2: DD2.38 X29.3 | length 92.1
  Top Layer w0.3: DD2.38@321.815,197.265 321.815,198.39 320.969,199.236 320.969,204.176 318.77,206.375 318.77,213.995 319.405,214.63 345.44,214.63 v1(351.79,220.98)
  Bottom Layer w0.5: v1(351.79,220.98) 353.695,222.885 370.84,222.885 382.905,210.82 X29.3@384.175,210.82
SIM900_DBG_RX: DD1.28 R15.2 X5.2 | length 56.2
  Top Layer w0.5: v1(373.38,151.13) 375.89,153.64 DD1.28@375.89,158.43
  Bottom Layer w0.5: X5.2@364.49,127 365.76,127 368.935,130.175 368.935,132.715 374.65,138.43 382.905,138.43 383.495,139.02 383.495,149.225 ; v1(373.38,151.13) 375.285,149.225 383.495,149.225 ; R15.2@383.495,150.495 383.495,149.225
SIM900_DBG_TX: DD1.27 X5.1 | length 51.4
  Top Layer w0.5: v1(373.38,148.59) 376.89,152.1 DD1.27@376.89,158.43
  Bottom Layer w0.5: X5.1@364.49,129.54 366.395,129.54 367.665,130.81 367.665,133.35 374.015,139.7 381.635,139.7 382.27,140.335 382.27,147.32 381.635,147.955 374.015,147.955 v1(373.38,148.59)
SIM900_MIC_KEY: DA13.9 DD2.42 | length 45.4
  Top Layer w0.3: DD2.42@319.815,197.265 319.815,202.79 317.5,205.105 317.5,215.265 318.135,215.9 341.585,215.9 342.05,216.365 DA13.9@342.05,217.805
SIM900_MIC_MN: C38.1 DD1.20 R187.2 | length 9.7
  Top Layer w0.5: DD1.20@383.89,158.43 v1(383.89,161.005)
  Bottom Layer w0.5: C38.1@381,156.21 R187.2@382.86,156.21 382.86,157.4 383.89,158.43 v1(383.89,161.005)
SIM900_MIC_PL: C37.1 DD1.19 R187.1 | length 9.7
  Top Layer w0.5: DD1.19@384.89,158.43 384.89,160.1 v1(385.445,160.655)
  Bottom Layer w0.5: C37.1@384.81,153.67 R187.1@384.81,156.21 384.81,160.02 v1(385.445,160.655)
SIM900_PWR_KEY: DD1.1 DD2.85 X2.1 | length 105.1
  Top Layer w0.3: DD2.85@320.315,181.765 320.315,172.445 327.66,165.1 327.66,160.655 334.645,153.67 v1(337.185,153.67)
  Top Layer w0.5: v1(377.825,141.605) 378.46,141.605 381.635,138.43 DD1.1@389.89,138.43 X2.1@389.89,128.905
  Bottom Layer w0.3: v1(337.185,153.67) 342.265,153.67 354.33,141.605 v1(377.825,141.605)
SIM900_RX_MCU_TX: DD2.86 R13.1 X14.1 | length 81.3
  Top Layer w0.3: DD2.86@320.815,181.765 320.815,173.215 328.295,165.735 328.295,161.925 332.74,157.48 X14.1@335.28,157.48
  Bottom Layer w0.3: X14.1@335.28,157.48 335.28,160.02 335.915,160.655 341.63,160.655 356.235,146.05 R13.1@375.92,146.05
SIM900_SPK: DA13.1 DA15.7 R189.2 | length 11
  Top Layer w0.5: v1(326.605,224.155) 328.25,224.155 330.79,226.695 DA13.1@336.55,226.695
SIM900_SPK_PL: C39.2 DD1.21 | length 127.5
  Top Layer w0.5: v1(359.41,165.1) 371.475,165.1 375.92,160.655 382.27,160.655 382.89,160.035 DD1.21@382.89,158.43
  Bottom Layer w0.5: v1(328.93,218.395) 330.245,219.71 335.28,219.71 335.28,217.805 338.455,214.63 363.855,214.63 364.49,213.995 364.49,195.58 363.855,194.945 356.235,194.945 353.06,191.77 353.06,171.45 v1(359.41,165.1)
SIM900_TX_MCU_RX: DD1.9 DD2.87 X14.2 | length 95
  Top Layer w0.3: DD2.87@321.315,181.765 321.315,173.985 328.93,166.37 328.93,162.56 330.835,160.655 337.185,160.655 337.82,160.02 X14.2@337.82,157.48
  Top Layer w0.5: v1(377.825,143.51) 385.445,143.51 388.365,146.43 DD1.9@389.89,146.43
  Bottom Layer w0.3: X14.2@337.82,157.48 337.82,155.575 338.455,154.94 342.265,154.94 353.695,143.51 v1(377.825,143.51)
SIM900_VBAT: C24.1 C25.1 DD1.55 DD1.56 DD1.57 M19.3 R116.1 | length 92.8
  Top Layer w1: 389.65,183.12 M19.3@389.65,185.42
  Top Layer w2: C24.1@363.855,185.42 C25.1@379.095,185.42 380.365,185.42 384.175,181.61 389.89,181.61 ; DD1.56@373.89,134.43 373.89,145.29 383.54,154.94 386.715,154.94 389.89,158.115 389.89,181.61 ; 389.89,182.88 389.89,181.61
  Bottom Layer w0.7: R116.1@361.95,189.865 363.22,189.865 363.855,189.23 C24.1@363.855,185.42
SIM900_VBAT_KEY: DD2.82 M20.1 R126.1 | length 62.7
  Top Layer w0.3: DD2.82@318.815,181.765 318.815,182.925 319.405,183.515 v1(320.04,183.515) ; v1(334.01,180.34) 354.965,180.34 355.6,179.705 355.6,173.99 356.87,172.72 v1(359.41,172.72)
  Bottom Layer w0.3: v1(320.04,183.515) 322.58,183.515 323.215,182.88 323.215,182.245 325.12,180.34 v1(334.01,180.34)
  Bottom Layer w0.5: v1(359.41,172.72) 363.22,176.53 R126.1@367.665,176.53
  Bottom Layer w0.7: R126.1@367.665,176.53 367.98,176.215 M20.1@370.205,176.215
SIM900_VDD_EXT: DD1.15 R15.1 | length 5.2
  Top Layer w0.5: v1(385.445,150.495) 387.38,152.43 DD1.15@389.89,152.43
SIM_CLK: DD1.32 R23.2 | length 25.4
  Top Layer w0.5: R23.2@353.74,149.86 360.68,149.86 361.95,151.13 361.95,156.21 362.399,156.659 371.289,156.659 371.89,157.26 DD1.32@371.89,158.43
SIM_DATA: DD1.31 R24.1 | length 28.4
  Top Layer w0.5: R24.1@353.695,147.32 361.95,147.32 363.22,148.59 363.22,154.94 363.837,155.557 371.457,155.557 372.89,156.99 DD1.31@372.89,158.43
SIM_RES: DD1.33 R25.2 | length 23.9
  Top Layer w0.5: v1(364.49,158.75) 366.395,160.655 370.205,160.655 370.89,159.97 DD1.33@370.89,158.43
  Bottom Layer w0.5: v1(353.74,152.4) 360.68,152.4 361.95,153.67 361.95,156.21 v1(364.49,158.75)
SIM_VDD: DD1.30 X16.SIM_VDD | length 68.6
  Top Layer w0.5: X16.SIM_VDD@341.985,124.83 341.985,126.365 347.345,131.725 347.345,153.67 348.615,154.94 353.695,154.94 354.33,155.575 354.33,161.925 355.6,163.195 371.475,163.195 373.89,160.78 DD1.30@373.89,158.43
SOCK_VOLT_PRES_B1: DA5.7 X30.4 | length 27
  Top Layer w0.5: X30.4@173.355,184.785 175.26,184.785 176.53,183.515 176.53,169.545 177.8,168.275 182.245,168.275 183.515,169.545 DA5.7@183.515,170.815
SOCK_VOLT_PRES_B2: DD2.68 X31.4 | length 17.8
  Top Layer w0.3: X31.4@297.18,184.785 298.45,184.785 300.68,187.015 DD2.68@314.065,187.015
SOCKET: D6.1 R94.1 X18.+ X20.2 | length 254.8
  Top Layer w2: X20.2@175.26,209.55 170.815,209.55 170.815,234.95 175.26,239.395 266.065,239.395 266.065,128.905 262.89,125.73 260.35,125.73 259.08,124.46 X18.+@259.08,121.285 ; D6.1@260.35,234.664 265.716,234.664
SOUND_MUTE: DA14.3 DD2.41 | length 74.1
  Top Layer w0.3: DD2.41@320.315,197.265 320.315,203.56 318.135,205.74 318.135,214.63 318.77,215.265 344.805,215.265 347.98,218.44 347.98,235.585 347.345,236.22 v1(342.265,236.22)
  Bottom Layer w0.5: DA14.3@340.995,236.22 v1(342.265,236.22)
SOUND_SRC_SEL: DA13.10 DD2.43 | length 47.3
  Top Layer w0.3: DD2.43@319.315,197.265 319.315,202.02 316.865,204.47 316.865,215.9 317.5,216.535 340.36,216.535 340.36,218.44 340.995,219.075 DA13.10@342.05,219.075
SWCLK: DD2.76 R32.2 X17.1 | length 12
  Top Layer w0.3: v1(314.96,175.26) 315.815,176.115 DD2.76@315.815,181.765
  Bottom Layer w0.3: X17.1@312.42,173.99 313.69,173.99 v1(314.96,175.26) 315.595,175.895 R32.2@315.595,177.12
SWDIO: DD2.72 R36.1 X17.2 | length 12.4
  Top Layer w0.3: v1(312.129,181.885) 312.129,184.494 312.65,185.015 DD2.72@314.065,185.015
  Bottom Layer w0.3: v1(312.129,181.885) 312.06,181.885 310.515,180.34 310.515,177.165 311.15,176.53 X17.2@312.42,176.53
USB_DM: C3.2 DD2.70 R3.2 | length 62.3
  Top Layer w0.3: v1(309.245,140.335) 309.245,144.145 311.15,146.05 311.15,169.545 309.245,171.45 309.245,184.785 310.475,186.015 DD2.70@314.065,186.015
  Bottom Layer w0.3: R3.2@301.625,137.84 301.625,139.7 ; C3.2@301.625,140.925 301.625,139.7 ; v1(309.245,140.335) 308.61,139.7 301.625,139.7
USB_DP: C2.2 DD2.71 R4.2 | length 61.5
  Top Layer w0.3: R4.2@299.765,140.97 C2.2@301.58,140.97 ; v1(311.15,143.51) 311.785,144.145 311.785,170.18 309.88,172.085 309.88,184.15 311.245,185.515 DD2.71@314.065,185.515
  Bottom Layer w0.3: v1(299.72,140.97) 299.72,142.24 300.99,143.51 v1(311.15,143.51)
VBUS: DD2.69 R6.2 R9.1 | length 58.7
  Top Layer w0.3: 306.07,143.51 310.515,147.955 310.515,168.91 308.61,170.815 308.61,185.42 309.705,186.515 DD2.69@314.065,186.515
  Top Layer w0.5: R6.2@297.86,143.51 306.07,143.51
VREF_B1: DA11.8 DA11.9 DA11.12 X24.6 | length 62.1
  Top Layer w0.5: v1(215.685,208.915) DA11.8@215.685,207.645 215.9,207.645 216.535,207.01 v1(240.665,207.01)
  Bottom Layer w0.5: v1(215.685,208.915) 216.535,208.915 217.17,209.55 217.17,212.09 216.535,212.725 v1(215.685,212.725) ; v1(240.665,207.01) 247.65,207.01 251.46,203.2 255.27,203.2 256.54,201.93 256.54,194.945 258.445,193.04 X24.6@260.35,193.04
VREF_B2: DD2.21 X25.6 | length 60
  Top Layer w0.3: DD2.21@329.565,193.515 332.58,193.515 336.55,197.485 v1(336.55,198.12) ; v1(358.775,199.39) 363.855,199.39 370.205,193.04 X25.6@384.175,193.04
  Bottom Layer w0.3: v1(336.55,198.12) 353.695,198.12 354.965,199.39 v1(358.775,199.39)
pads on no net: DA4.3 DA10.3 DA13.14 DA14.1 DA14.2 DA14.7 DA14.8 DA14.9 DA14.10 DA14.15 DA14.16 DD1.2 DD1.4 DD1.5 DD1.6 DD1.7 DD1.8 DD1.11 DD1.12 DD1.13 DD1.14 DD1.16 DD1.22 DD1.23 DD1.24 DD1.25 DD1.26 DD1.34 DD1.35 DD1.36 DD1.37 DD1.38 DD1.40 DD1.41 DD1.42 DD1.43 DD1.44 DD1.47 DD1.48 DD1.49 DD1.50 DD1.51 DD1.52 DD1.66 DD1.67 DD1.68 DD2.7 DD2.8 DD2.9 DD2.26 DD2.35 DD2.36 DD2.39 DD2.40 DD2.73 DD2.84 DD2.95 DD3.4 DD3.5 DD3.8 DD3.9 DD3.10 DD3.15 DD3.16 DD3.17 DD3.18 DD3.19 DD3.20 DD3.21 DD3.22 DD3.23 DD3.24 DD3.25 DD3.26 DD3.27 DD3.28 X1.0 X1.ID X16.0 X16.SIM_VPP
copper on no net: | length 8.1
  Top Layer w0.2: 244.475,109.22 243.84,109.22 243.84,110.49 244.475,110.49 ; 244.475,109.22 244.475,110.49 ; 244.475,109.22 245.11,108.585 245.11,111.125 244.475,110.49

## Polygon pours and split planes (outlines as drawn)
DGND_B1 on Top Layer "SCR_POLY3" (solid, pour order 11): 169.545,241.3 267.97,241.3 267.97,108.585 169.545,108.585
DGND_B2 on Top Layer "SCR_POLY1" (solid, pour order 8): 293.37,241.3 391.795,241.3 391.795,162.56 361.95,162.56 361.95,121.92 293.37,121.92
DGND_B1 on Bottom Layer "SCR_POLY4" (solid, pour order 13): 169.545,241.3 267.97,241.3 267.97,108.585 169.545,108.585
DGND_B2 on Bottom Layer "SCR_POLY2" (solid, pour order 6): 293.37,241.3 391.795,241.3 391.795,162.56 361.95,162.56 361.95,121.92 293.37,121.92

## Other copper
Top Layer:
  rectangle net HVGND_B2: 381.803,130.496 382.617,131.205
  rectangle net HVGND_B2: 379.095,129.54 381.89,131.445
  rectangle net HVGND_B2: 378.89,130.795 382.89,133.35
  rectangle net HVGND_B2: 375.92,130.175 376.747,133.35
  rectangle net NetD5_1: 173.355,214.63 184.785,220.98
  rectangle net EXT_12V_CH2: 189.23,121.92 199.39,129.54
  rectangle net EXT_12V_CH1: 171.45,121.92 181.61,129.54
  rectangle net 3.3V_B1: 216.535,220.98 221.615,229.87
  rectangle net 3.3V_B1: 220.98,220.98 224.79,222.885
  rectangle: 313.055,122.555 331.47,136.525
  text "ClubNIKA" at 314.96,147.32 h2
  text "+" at 175.26,108.585 h3
  text "1" at 180.975,108.585 h2.52
  text "2" at 186.055,108.585 h2.52
  text "-" at 190.5,108.585 h3
  text "3" at 196.215,108.585 h2.52
  text "4" at 201.295,108.585 h2.52
  text "+" at 205.74,108.585 h3
  text "5" at 211.455,108.585 h2.52
  text "6" at 216.535,108.585 h2.52
  text "-" at 220.98,108.585 h3
  text "7" at 226.695,108.585 h2.52
  text "8" at 231.775,108.585 h2.52
  text "+" at 236.22,108.585 h3
  text "+" at 241.3,108.585 h2.5
  text "-" at 246.38,108.585 h2.5
Bottom Layer:
  rectangle net NetD5_1: 173.355,214.63 184.785,220.98
  rectangle net 3.3V_B1: 216.535,222.885 227.965,229.87
  rectangle net HVGND_B2: 377.19,132.715 379.095,135.89

## Silkscreen, mask and mechanical layers (free items; w line width, h text height)
Top Overlay:
  circle w0.254: c234.315,158.75 r2.54
  lines w0.2: 168.275,107.315 168.275,242.57 269.24,242.57 269.24,107.315 168.275,107.315 ; 292.1,120.65 393.065,120.65 393.065,242.57 292.1,242.57 292.1,120.65
Bottom Overlay:
  lines w0.2: 208.04,154.305 208.04,161.925 ; 269.24,151.765 267.335,151.765 267.335,158.115 269.24,158.115 ; 269.24,229.87 267.335,229.87 267.335,236.22 269.24,236.22 ; 391.16,151.765 391.16,158.115 393.065,158.115 ; 202.565,131.445 210.185,131.445 210.185,139.065 202.565,139.065 202.565,131.445
Top Solder:
  rectangle: 173.355,214.63 184.785,220.98
  rectangle: 216.535,220.98 221.615,229.87
  rectangle: 220.98,220.98 224.79,222.885
  rectangle: 171.45,121.92 181.61,129.54
  rectangle: 189.23,121.92 199.39,129.54
  lines w0.6: 207.01,236.22 207.645,235.585 207.645,234.95 207.645,231.14 208.28,230.505 208.28,230.493 208.603,230.17 209.395,230.17 ; 212.09,231.14 216.535,231.14 218.44,233.045 ; 386.08,188.595 384.81,187.325 384.81,185.42 385.76,184.47 387.35,184.47 ; 389.664,185.451 389.664,183.348 389.989,183.023
  lines w0.7: 259.08,121.285 259.08,124.46 260.35,125.73 262.89,125.73 266.065,128.905 266.065,234.315 265.716,234.664 260.35,234.664 ; 314.96,124.46 330.2,124.46 330.2,132.08 327.025,132.08 325.755,133.35 324.485,134.62 322.58,134.62 322.58,132.715 320.675,132.715 318.77,134.62 314.96,134.62 314.96,124.46
  text "ClubNIKA" at 314.96,147.32 h2
  text "Dr.Machine" at 313.69,142.24 h2
  text "Club13" at 316.865,139.065 h2
  text "SD" at 318.77,126.365 h4
Bottom Solder:
  rectangle: 173.355,214.63 184.785,220.98
  rectangle: 216.535,222.885 227.965,229.87
  lines w0.7: 177.8,156.845 177.8,161.29 179.07,162.56 197.485,162.56 ; 197.485,156.845 197.485,162.56 ; 237.575,234.664 237.575,234.4 236.22,233.045 236.22,218.44 232.41,214.63 232.41,210.185 237.49,205.105 237.49,199.39 237.49,177.165 229.235,168.91 211.455,168.91 203.835,168.91 197.485,162.56
  lines w1: 175.895,111.125 236.855,111.125 ; 187.96,157.48 190.5,157.48 201.295,146.685 201.295,140.97 201.295,126.365 243.84,126.365 247.015,123.19 247.015,115.57 250.825,111.76 259.08,111.76 ; 191.135,120.015 247.015,120.015 ; 198.12,123.19 241.935,123.19

## Text inside footprints (layer, text, board x,y; h text height)
C13: Top Overlay "+" at 234.665,229.334 h1.52 r270
C14: Top Overlay "+" at 243.49,209.451 h1.52 r90
C15: Top Overlay "+" at 189.865,163.83 h3 r270
C17: Top Overlay "+" at 254.285,222.151 h1.52 r90
C24: Top Overlay "+" at 365.76,186.69 h3 r270
C25: Top Overlay "+" at 381,186.69 h3 r270
C34: Top Overlay "+" at 337.47,231.676 h1.52 r90
MIC1: Top Overlay "+" at 312.42,236.855 h1.52 r180